# Altium PCB sminiC3_eink_ASCII.PCBDOC
Units mil, origin at the board's own origin, x right, y up, seen from the top; angles counter-clockwise.
Board outline 1968.5 x 1141.73 mil, 2 copper layers (Top Layer, Bottom Layer); 6 components, 16 nets, 30 pads, 1 vias.
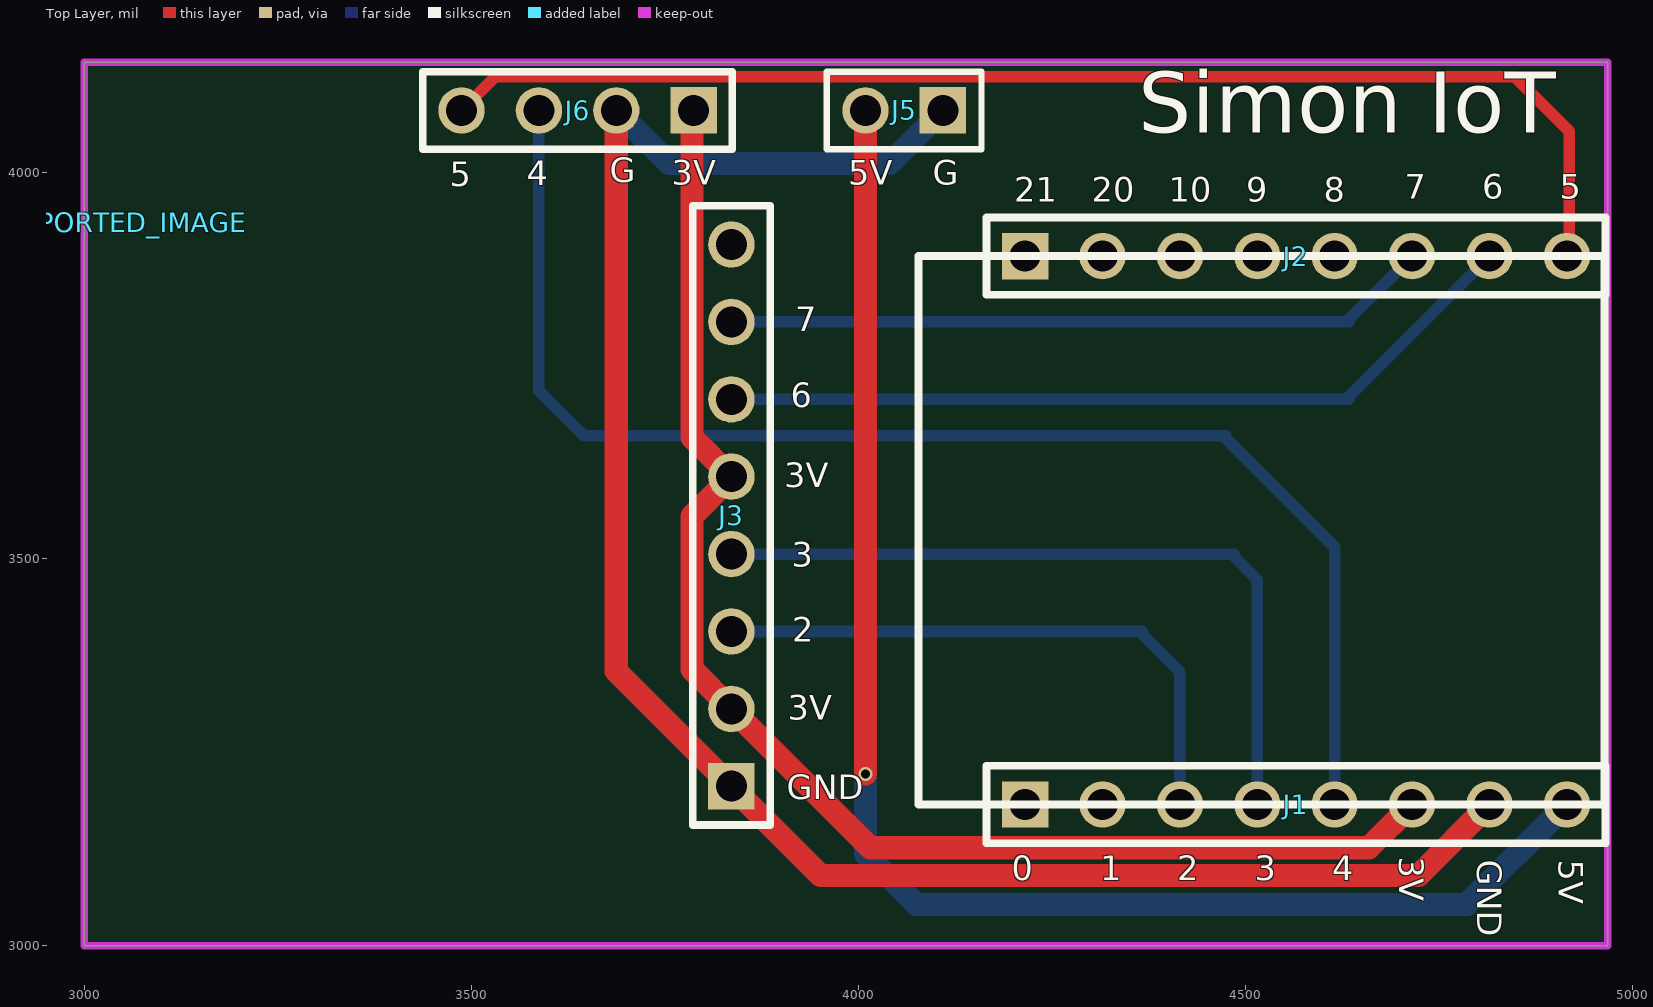
[diagram p0: Top Layer view]
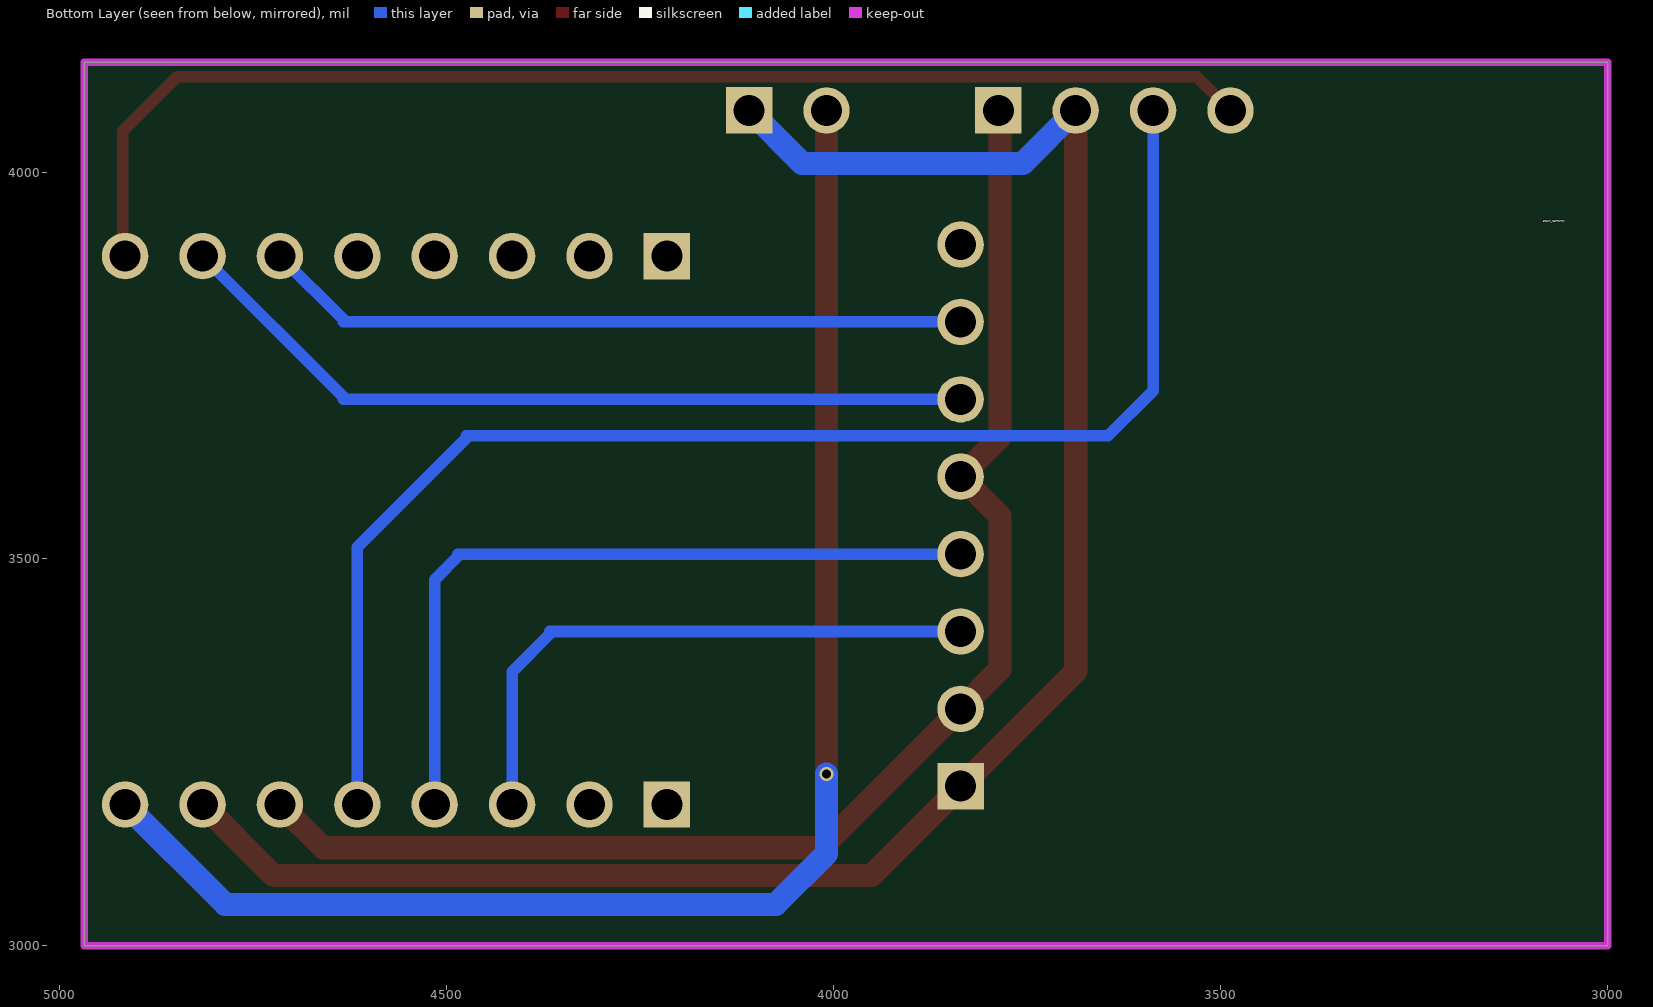
[diagram p1: Bottom Layer view, seen from below]

## Layer stack, top to bottom
Top Solder Mask Layer: solder mask 0.4, Solder Resist, Dk 3.5
Top Layer: signal copper 1.4
Dielectric1: dielectric 12.6, FR-4, Dk 4.8
Bottom Layer: signal copper 1.4
Bottom Solder Mask Layer: solder mask 0.4, Solder Resist, Dk 3.5

## Board outline
4968.5,4141.73 3000,4141.73 3000,3000 4968.5,3000

## Design rules (kind name [scope] priority, off if disabled: settings)
AssemblyTestPointUsage [All] p0: scope1count=1 scope1_0_kind=Board scope1_0_value=Board scope2count=1 scope2_0_kind=Board scope2_0_value=Board commentlength=0
AssemblyTestpoint [All] p0: scope1count=1 scope1_0_kind=Board scope1_0_value=Board scope2count=1 scope2_0_kind=Board scope2_0_value=Board commentlength=0
Clearance [All] p0: scope1count=1 scope1_0_kind=Board scope1_0_value=Board scope2count=1 scope2_0_kind=Board scope2_0_value=Board commentlength=0 gap=10
Clearance [All] p1: gap=10 ignorepadtopadclearanceinfootprint=FALSE except(0: Arc-Hole Track-Hole SMDPad-Hole THPad-Hole Via-Hole Fill-Hole Poly-Hole Region-Hole Text-Hole)
ComponentClearance [All] p0: scope1count=1 scope1_0_kind=Board scope1_0_value=Board scope2count=1 scope2_0_kind=Board scope2_0_value=Board commentlength=0 gap=10 collisioncheckmode=3
DiffPairsRouting [All] p0: scope1count=1 scope1_0_kind=Board scope1_0_value=Board scope2count=1 scope2_0_kind=Board scope2_0_value=Board commentlength=0
FabricationTestPointUsage [All] p0: scope1count=1 scope1_0_kind=Board scope1_0_value=Board scope2count=1 scope2_0_kind=Board scope2_0_value=Board commentlength=0 valid=0 allowmultiple=FALSE
FabricationTestpoint [All] p0: scope1count=1 scope1_0_kind=Board scope1_0_value=Board scope2count=1 scope2_0_kind=Board scope2_0_value=Board commentlength=0 side=3 testpointundercomponent=TRUE minsize=40 maxsize=100 preferedsize=60 minholesize=0 maxholesize=40 preferedholesize=32 testpointgrid=1
FanoutControl Fanout_BGA [All] p0 off: scope1count=1 scope1_0_kind=Board scope1_0_value=Board scope2count=1 scope2_0_kind=Board scope2_0_value=Board commentlength=69 // Protel DXP Scope 1 Expression Was: IsBGA   Fanout_BGA (Default Rule)
FanoutControl Fanout_LCC [All] p0 off: scope1count=1 scope1_0_kind=Board scope1_0_value=Board scope2count=1 scope2_0_kind=Board scope2_0_value=Board commentlength=69 // Protel DXP Scope 1 Expression Was: IsLCC   Fanout_LCC (Default Rule)
FanoutControl Fanout_SOIC [All] p0 off: scope1count=1 scope1_0_kind=Board scope1_0_value=Board scope2count=1 scope2_0_kind=Board scope2_0_value=Board commentlength=71 // Protel DXP Scope 1 Expression Was: IsSOIC   Fanout_SOIC (Default Rule)
FanoutControl Fanout_Small [All] p0 off: scope1count=1 scope1_0_kind=Board scope1_0_value=Board scope2count=1 scope2_0_kind=Board scope2_0_value=Board commentlength=84 // Protel DXP Scope 1 Expression Was: (CompPinCount < 5)   Fanout_Small (Default Rule)
FanoutControl Fanout_Default [All] p0: scope1count=1 scope1_0_kind=Board scope1_0_value=Board scope2count=1 scope2_0_kind=Board scope2_0_value=Board commentlength=30 // Fanout_Default (Default Rule)
Height [All] p0: scope1count=1 scope1_0_kind=Board scope1_0_value=Board scope2count=1 scope2_0_kind=Board scope2_0_value=Board commentlength=0
HoleSize [All] p0: scope1count=1 scope1_0_kind=Board scope1_0_value=Board scope2count=1 scope2_0_kind=Board scope2_0_value=Board commentlength=0 absolutevalues=TRUE maxlimit=100 minlimit=1 maxpercent=80.000 minpercent=20.000
HoleToHoleClearance [All] p0: scope1count=1 scope1_0_kind=Board scope1_0_value=Board scope2count=1 scope2_0_kind=Board scope2_0_value=Board commentlength=0
LayerPairs [All] p0: scope1count=1 scope1_0_kind=Board scope1_0_value=Board scope2count=1 scope2_0_kind=Board scope2_0_value=Board commentlength=0 enforce=TRUE
MinimumSolderMaskSliver [All] p0: scope1count=1 scope1_0_kind=Board scope1_0_value=Board scope2count=1 scope2_0_kind=Board scope2_0_value=Board commentlength=0
NetAntennae [All] p0: scope1count=1 scope1_0_kind=Board scope1_0_value=Board scope2count=1 scope2_0_kind=Board scope2_0_value=Board commentlength=0
PasteMaskExpansion [All] p0: scope1count=1 scope1_0_kind=Board scope1_0_value=Board scope2count=1 scope2_0_kind=Board scope2_0_value=Board commentlength=0 expansion=0
PlaneClearance [All] p0: scope1count=1 scope1_0_kind=Board scope1_0_value=Board scope2count=1 scope2_0_kind=Board scope2_0_value=Board commentlength=0 clearance=20
PlaneConnect [All] p0: scope1count=1 scope1_0_kind=Board scope1_0_value=Board scope2count=1 scope2_0_kind=Board scope2_0_value=Board commentlength=0 planeconnectstyle=Relief reliefexpansion=20 reliefentries=4 reliefconductorwidth=10 reliefairgap=10
PolygonConnect [All] p0: scope1count=1 scope1_0_kind=Board scope1_0_value=Board scope2count=1 scope2_0_kind=Board scope2_0_value=Board commentlength=0 connectstyle=Relief reliefconductorwidth=10 reliefentries=4 polygonreliefangle="90 Angle"
PolygonConnect [All] p1: connectstyle=Relief reliefconductorwidth=10 reliefentries=4 polygonreliefangle="90 Angle" airgapwidth=10
RoutingCorners [All] p0: scope1count=1 scope1_0_kind=Board scope1_0_value=Board scope2count=1 scope2_0_kind=Board scope2_0_value=Board commentlength=0 cornerstyle=45-Degree minsetback=100 maxsetback=100
RoutingLayers [All] p0: scope1count=1 scope1_0_kind=Board scope1_0_value=Board scope2count=1 scope2_0_kind=Board scope2_0_value=Board commentlength=0 top layer=Automatic bottom layer=Automatic
RoutingPriority [All] p0: scope1count=1 scope1_0_kind=Board scope1_0_value=Board scope2count=1 scope2_0_kind=Board scope2_0_value=Board commentlength=0
RoutingTopology [All] p0: scope1count=1 scope1_0_kind=Board scope1_0_value=Board scope2count=1 scope2_0_kind=Board scope2_0_value=Board commentlength=0 topology=Shortest
RoutingVias [All] p0: scope1count=1 scope1_0_kind=Board scope1_0_value=Board scope2count=1 scope2_0_kind=Board scope2_0_value=Board commentlength=0 holewidth=28 width=50 viastyle="Through Hole" minholewidth=28 minwidth=50 maxholewidth=28 maxwidth=50
RoutingVias [All] p1: holewidth=28 width=50 viastyle="Through Hole" minholewidth=28 minwidth=50 maxholewidth=28 maxwidth=50
ShortCircuit [All] p0: scope1count=1 scope1_0_kind=Board scope1_0_value=Board scope2count=1 scope2_0_kind=Board scope2_0_value=Board commentlength=0 allowed=FALSE
SilkToBoardRegionClearance [All] p0: scope1count=1 scope1_0_kind=Board scope1_0_value=Board scope2count=1 scope2_0_kind=Board scope2_0_value=Board commentlength=0
SilkToSilkClearance [All] p0: scope1count=1 scope1_0_kind=Board scope1_0_value=Board scope2count=1 scope2_0_kind=Board scope2_0_value=Board commentlength=0
SilkToSolderMaskClearance [All] p0 off: scope1count=1 scope1_0_kind=Board scope1_0_value=Board scope2count=1 scope2_0_kind=Board scope2_0_value=Board commentlength=44 // Protel DXP Scope 1 Expression Was: IsPad
SolderMaskExpansion [All] p0: scope1count=1 scope1_0_kind=Board scope1_0_value=Board scope2count=1 scope2_0_kind=Board scope2_0_value=Board commentlength=0 expansion=4
SolderMaskExpansion [All] p1: expansion=4
UnRoutedNet [All] p0: scope1count=1 scope1_0_kind=Board scope1_0_value=Board scope2count=1 scope2_0_kind=Board scope2_0_value=Board commentlength=0
UnpouredPolygon [All] p0: scope1count=1 scope1_0_kind=Board scope1_0_value=Board scope2count=1 scope2_0_kind=Board scope2_0_value=Board commentlength=0
Width [All] p0: scope1count=1 scope1_0_kind=Board scope1_0_value=Board scope2count=1 scope2_0_kind=Board scope2_0_value=Board commentlength=0 maxlimit=10 minlimit=10 preferedwidth=10
Width [All] p1: maxlimit=10 minlimit=10 preferedwidth=10
30 further rules are at their usual default settings.

## Components (designator, comment, footprint, x,y, rotation, side; value= is the part's Value field where it differs from the comment)
IMPORTED_IMAGE "" IMPORTED_IMAGE 3055,3935 r0 top
J1 "C3/front/left" HDR8_2.54 4215.75,3182.68 r0 top
J2 "C3/front/right" HDR8_2.54 4215.75,3891.34 r0 top
J3 "EINK" HDR8_2.54 3836.22,3206.3 r90 top
J5 "CON/2P 2.54" HDR2_2.54 4109.45,4079.53 r180 top
J6 "SHT3X" HDR4_2.54 3787.4,4079.53 r180 top

## Footprints (in the part's own frame and the unit in brackets; to place one, negate y for a bottom-side part, rotate by r counter-clockwise, add the part's x,y. Pads: shape width x height; smd on the part's side, far side on the other; paste and mask are expansions set on the pad)
HDR2_2.54 [mil]
  rect 60x60 hole 40: 1(0,0)
  round 60 hole 40: 2(100,0)
  silkscreen extent -50,-50 150,50
HDR4_2.54 [mil]
  rect 60x60 hole 40: 1(0,0)
  round 60 hole 40: 2(100,0) 3(200,0) 4(300,0)
  silkscreen extent -50,-50 350,50
HDR8_2.54 [mil]
  rect 60x60 hole 40: 1(0,0)
  round 60 hole 40: 2(100,0) 3(200,0) 4(300,0) 5(400,0) 6(500,0) 7(600,0) 8(700,0)
  silkscreen extent -50,-50 750,50
IMPORTED_IMAGE [mil]

## Via types
v1: diameter 18, hole 12, Top Layer to Bottom Layer, 1 vias

## Nets (pads, with @x,y where several pads share a name; then routed paths per layer and width w, separated by ;. In a path a pad name is that pad's centre, name@x,y a point inside that pad or via, vN(x,y) a via of type N, cw(c..) or ccw(c..) an arc to the next point about the centre after c; other vN are vias at no path point)
3V: J1.6 J3.2 J3.5 J6.1 | length 1814.6
  Top Layer w30: J6.1 3785.22,4077.35 3785.22,3657.3 J3.5 3785.22,3555.3 3785.22,3357.3 J3.2 4015.75,3126.77 4659.84,3126.77 J1.6
5V: J1.8 J5.2 | length 1947.5
  Top Layer w30: v1(4009.45,3222.05) J5.2
  Bottom Layer w30: v1(4009.45,3222.05) 4009.45,3118.9 4074.8,3053.54 4786.61,3053.54 J1.8
GIO0: J1.1
GIO1: J1.2
GIO2: J1.3 J3.3 | length 775.9
  Bottom Layer w15: J3.3 4366.93,3406.3 ; 4363.78,3406.3 4415.75,3354.33 J1.3
GIO3: J1.4 J3.4 | length 986.9
  Bottom Layer w15: J3.4 4485.83,3506.3 ; 4482.68,3506.3 4515.75,3473.23 J1.4
GIO4: J1.5 J6.3 | length 1809.8
  Bottom Layer w15: J6.3 3587.4,3717.32 3645.67,3659.06 4474.8,3659.06 ; 4471.65,3659.06 4615.75,3514.96 J1.5
GIO5: J2.8 J6.4 | length 1640.2
  Top Layer w15: J6.4 3531.1,4123.22 4848.43,4123.22 4918.9,4052.76 J2.8@4918.9,3891.34
GIO6: J2.7 J3.6 | length 1059.3
  Bottom Layer w15: J3.6 4633.86,3706.3 ; 4630.71,3706.3 J2.7
GIO7: J2.6 J3.7 | length 917.9
  Bottom Layer w15: J3.7 4633.86,3806.3 ; 4630.71,3806.3 J2.6
GIO8: J2.5
GIO9: J2.4
GIO10: J2.3
GIO20: J2.2
GIO21: J2.1
GND: J1.7 J3.1 J5.1 J6.2 | length 2485
  Top Layer w30: J6.2 3687.4,3355.12 J3.1 3951.75,3090.77 4723.84,3090.77 J1.7 ; J6.2@3696.06,4079.53 J6.2@3696.06,4084.25
  Bottom Layer w30: J6.2 3755.91,4011.02 4040.94,4011.02 J5.1 ; J1.7@4814.96,3181.89 J1.7
pads on no net: J3.8

## Keep-outs
Board Outline Layer:
  the board outline again, w10.02

## Silkscreen, mask and mechanical layers (free items; w line width, h text height)
Top Silkscreen Layer:
  lines w10.02: 4077.95,3182.68 4964.57,3182.68 4964.57,3891.34 4077.95,3891.34 4077.95,3182.68
  text "Simon IoT" at 4362.19,4025.08 h135.94
  text "G" at 3678.74,3986.61 h31.5
  text "4" at 3571.65,3982.68 h31.5
  text "3V" at 3759.06,3983.46 h31.5
  text "5V" at 3987.4,3983.46 h31.5
  text "G" at 4096.06,3983.46 h31.5
  text "5" at 3472.44,3981.89 h31.5
  text "7" at 4706.3,3965.35 h31.5
  text "6" at 4806.3,3965.35 h31.5
  text "5" at 4906.3,3965.35 h31.5
  text "21" at 4201.57,3961.42 h31.5
  text "20" at 4301.57,3961.42 h31.5
  text "10" at 4401.57,3961.42 h31.5
  text "9" at 4501.57,3961.42 h31.5
  text "8" at 4601.57,3961.42 h31.5
  text "7" at 3918.9,3794.49 h31.5
  text "6" at 3912.6,3696.06 h31.5
  text "3V" at 3904.72,3592.91 h31.5
  text "3" at 3914.17,3489.76 h31.5
  text "2" at 3914.96,3392.91 h31.5
  text "3V" at 3908.66,3292.13 h31.5
  text "GND" at 3907.87,3189.76 h31.5
  text "3V" at 4699.21,3114.96 h31.5 r270
  text "GND" at 4800,3111.02 h31.5 r270
  text "5V" at 4905.51,3111.02 h31.5 r270
  text "0" at 4198.43,3085.04 h31.5
  text "1" at 4312.6,3085.04 h31.5
  text "2" at 4412.6,3085.04 h31.5
  text "3" at 4512.6,3085.04 h31.5
  text "4" at 4612.6,3085.04 h31.5